# Altium PCB Board_VCA_Altium.pcbdoc
Units mm, origin at the board's own origin, x right, y up, seen from the top; angles counter-clockwise.
Board outline 57.86 x 53.54 mm, 2 copper layers (Top Layer, Bottom Layer); 18 components, 13 nets, 59 pads, 16 vias.
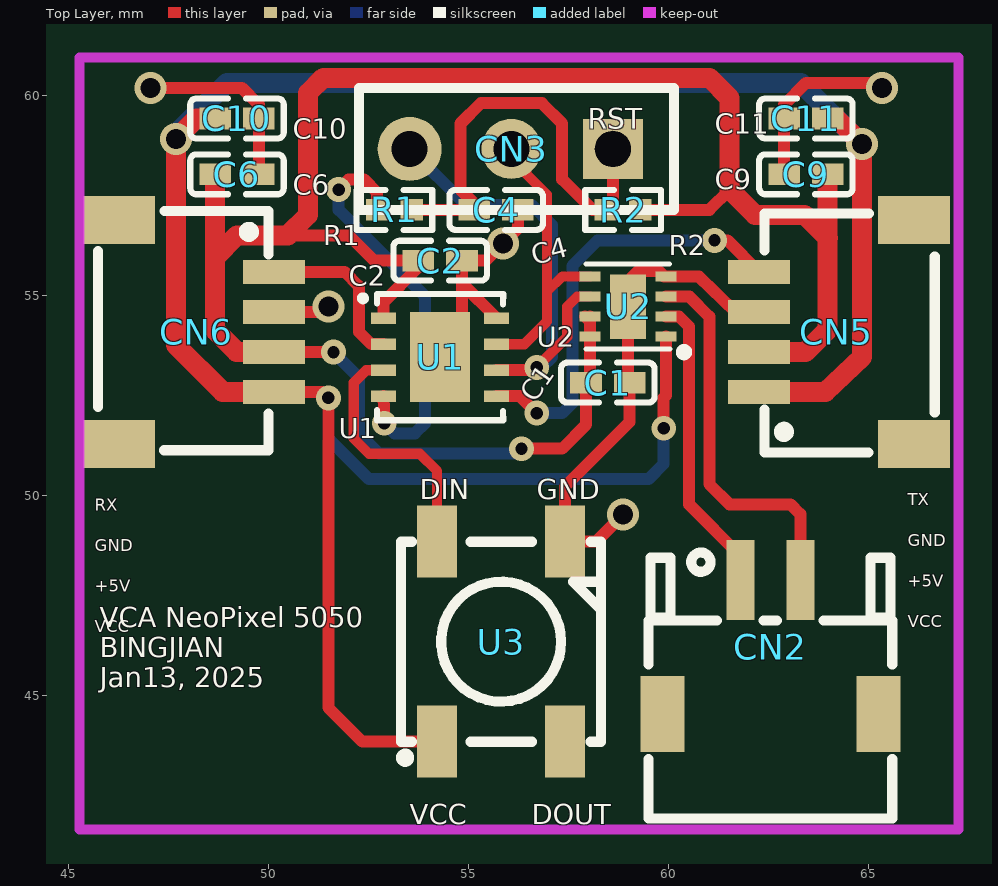
[diagram p0: Top Layer view]
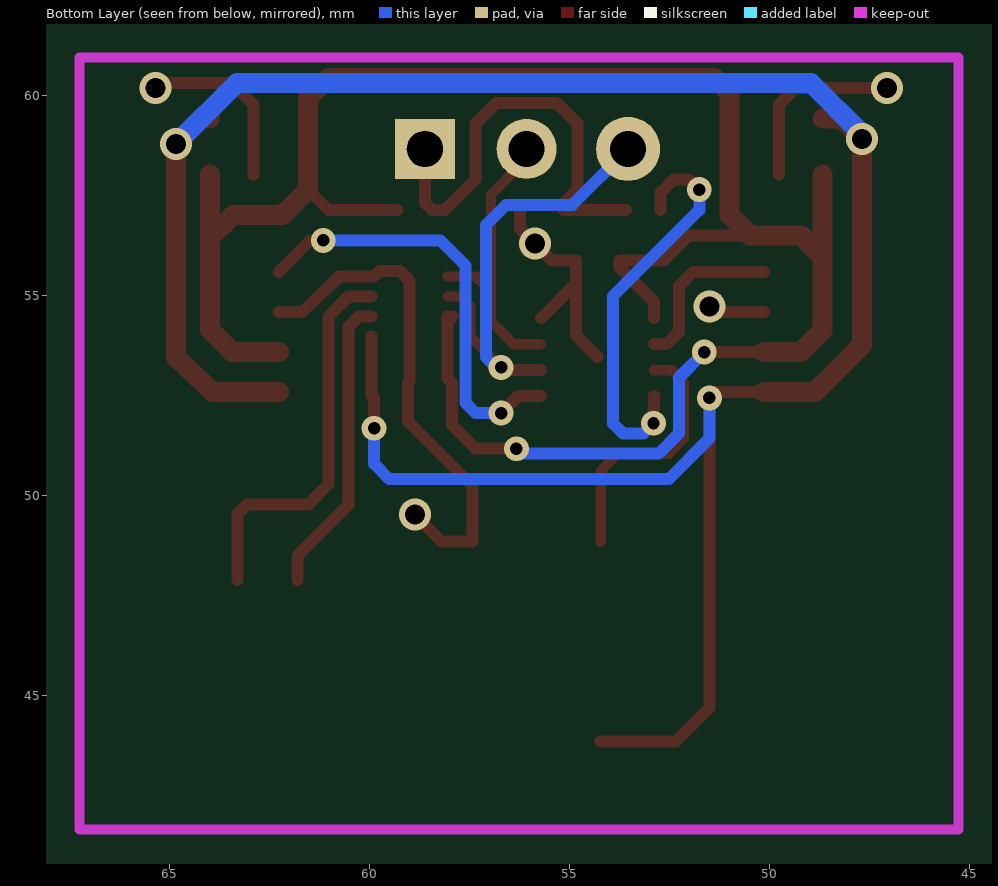
[diagram p1: Bottom Layer view, seen from below]

## Layer stack, top to bottom
Top Layer: signal copper (thickness not stored)
Dielectric: dielectric 0.32, FR-4, Dk 4.8
Bottom Layer: signal copper (thickness not stored)

## Board outline
83.258,25.4 25.4,25.4 25.4,78.942 83.258,78.942

## Components (designator, comment, footprint, x,y, rotation, side; value= is the part's Value field where it differs from the comment)
C1 "1uF" C0402 58.493,52.832 r180 top
C2 "100nF" C0402_NEW 54.302,55.88 r0 top
C4 "100nF" C0402_NEW 55.699,57.15 r180 top
C6 "C0402" C0402 49.222,58.039 r0 top
C9 "C0402" C0402 63.446,58.039 r0 top
C10 "C0402" C0402 49.222,59.436 r0 top
C11 "C0402" C0402 63.446,59.436 r0 top
CN2 "S2B-ZR-SM4A-TF(LF)(SN)" CONN-SMD_S2B-ZR-SM4A 62.557,46.228 r0 top
CN3 "3 Pads Solder" 3PADS-JED 56.08,58.674 r270 top
CN5 "SM04B-SRSS-TB (LF)(SN)" CONN-SMD_4P-P1.00_SM04B-SRSS-TB-LF-SN 64.208,54.102 r90 top
CN6 "SM04B-SRSS-TB (LF)(SN)" CONN-SMD_4P-P1.00_SM04B-SRSS-TB-LF-SN 48.206,54.102 r270 top
R1 "300Ω" R0402 53.159,57.15 r180 top
R2 "10kΩ" R0402 58.874,57.15 r0 top
U1 "PIC16F18313-E/RF" DFN-8_L3.0-W3.0-P0.65-BL-EP 54.302,53.467 r270 top
U2 "DRV8837DSGR" WSON-8_L2.0-W2.0-P0.50-TL-EP 59.001,54.737 r180 top
U3 "LED-SMD_4P-L5.0-W5.0-TL-2" LED-SMD_4P-L5.0-W5.0-TL-2 55.826,46.355 r90 top
? "" ? 56.271,63.639 r0 top
? "" ? 41.603,51.276 r0 top

## Footprints (in the part's own frame and the unit in brackets; to place one, negate y for a bottom-side part, rotate by r counter-clockwise, add the part's x,y. Pads: shape width x height; smd on the part's side, far side on the other; paste and mask are expansions set on the pad)
3PADS-JED [mm]
  rect 1.5x1.5 hole 0.9 slot 0.9 at 0 deg paste+0 mask+0.102: 1(0,2.54)
  round 1.5 hole 0.9 paste+0 mask+0.102: 2(0,0)
  round 1.6 hole 0.9 paste+0 mask+0.102: 3(0,-2.54)
  silkscreen extent -1.52,-3.81 1.52,4.06
C0402 [mm]
  rect 0.79x0.54 smd paste-100 mask+0.051: 1(-0.545,0) 2(0.545,0)
  silkscreen extent -1.17,-0.5 1.17,0.5
C0402_NEW [mm]
  rect 0.79x0.54 smd paste-100 mask+0.051: 1(-0.545,0) 2(0.545,0)
  silkscreen extent -1.17,-0.5 1.17,0.5
CONN-SMD_4P-P1.00_SM04B-SRSS-TB-LF-SN [mm]
  rect 0.6x1.55 smd paste+0 mask+0.051: 1(-1.5,1.938) 2(-0.5,1.938) 3(0.501,1.938) 4(1.5,1.938)
  rect 1.2x1.8 smd paste+0 mask+0.051: 5(2.8,-1.938) 6(-2.8,-1.938)
  silkscreen extent -3.02,-2.46 2.96,1.8
CONN-SMD_S2B-ZR-SM4A [mm]
  rect 1.1x1.9 smd paste+0 mask+0.051: 0(-2.7,-1.675) 0(2.7,-1.675)
  rect 0.7x2 smd paste+0 mask+0.051: 1(-0.75,1.675) 2(0.75,1.675)
  silkscreen extent -3.05,-4.29 3.05,2.36
DFN-8_L3.0-W3.0-P0.65-BL-EP [mm]
  rect 0.28x0.625 smd paste+0 mask+0.051: 1(-0.975,-1.412) 2(-0.325,-1.412) 3(0.325,-1.412) 4(0.975,-1.412) 5(0.975,1.412) 6(0.325,1.412) 7(-0.325,1.412) 8(-0.975,1.412)
  rect 2.25x1.5 smd paste+0 mask+0.051: 9(0,0)
  silkscreen extent -1.58,-2.01 1.58,1.58
LED-SMD_4P-L5.0-W5.0-TL-2 [mm]
  rect 1.8x1 smd paste+0 mask+0.051: 1(2.5,-1.6) 2(2.5,1.6) 3(-2.5,1.6) 4(-2.5,-1.6)
  silkscreen extent -3,-2.5 2.5,2.5
R0402 [mm]
  rect 0.566x0.54 smd paste-100 mask+0.051: 1(-0.433,0) 2(0.433,0)
  silkscreen extent -0.94,-0.5 0.94,0.5
WSON-8_L2.0-W2.0-P0.50-TL-EP [mm]
  rect 0.521x0.25 smd paste+0 mask+0.051: 1(-0.95,0.75) 2(-0.95,0.25) 3(-0.95,-0.25) 4(-0.95,-0.75) 5(0.95,-0.75) 6(0.95,-0.25) 7(0.95,0.25) 8(0.95,0.75)
  rect 0.902x1.613 smd paste+0 mask+0.051: 9(0,0.013)
  silkscreen extent -1.47,-1.06 1.06,1.22
? [mm]

## Via types
v1: diameter 0.62, hole 0.31, Top Layer to Bottom Layer, tented both sides, 9 vias
v2: diameter 0.8, hole 0.5, Top Layer to Bottom Layer, tented both sides, 7 vias

## Nets (pads, with @x,y where several pads share a name; then routed paths per layer and width w, separated by ;. In a path a pad name is that pad's centre, name@x,y a point inside that pad or via, vN(x,y) a via of type N, cw(c..) or ccw(c..) an arc to the next point about the centre after c; other vN are vias at no path point)
+5V: C1.2 C2.1 C6.1 C9.2 CN5.2 CN6.3 R2.2 U1.1 U2.7 U2.8 | length 54.6
  Top Layer w0.3: CN6.3 50.152,53.594 v1(51.635,53.594) ; 50.492,56.515 52.016,56.515 52.651,55.88 C2.1 53.757,55.716 52.89,54.849 U1.1 ; v1(56.334,51.181) 57.35,51.181 57.948,51.779 C1.2 58.051,52.935 U2.7 ; U2.7@57.924,54.487 58.051,54.36 U2.8 ; R2.2 61.033,57.15 61.541,57.658
  Top Layer w0.5: 48.676,55.844 48.676,55.969 49.222,56.515 50.492,56.515 51,57.023 51,60.071 51.381,60.452 61.033,60.452 61.541,59.944 61.541,57.658 62.176,57.023 63.416,57.023 63.992,56.446 ; C6.1 48.677,54.139 49.215,53.602 CN6.3 ; CN5.2 63.438,53.602 63.991,54.155 C9.2
  Bottom Layer w0.3: v1(51.635,53.594) 52.27,52.959 52.27,51.562 52.778,51.054 56.207,51.054 v1(56.334,51.181)
DIN: U1.3 U3.2 | length 6.5
  Top Layer w0.254: U1.3 52.453,53.142 52.143,52.832 52.143,51.435 52.524,51.054 53.794,51.054 54.226,50.622 U3.2
DOUT: U3.4
GND: C1.1 C2.2 C4.1 C6.2 C9.1 C10.2 C11.1 CN5.3 CN6.2 U1.8 U1.9 U2.4 U2.9 U3.1 | length 29.9
  Top Layer w0.3: v2(47.063,60.198) 49.349,60.198 49.767,59.78 C10.2 C6.2 ; CN6.2 51.373,54.602 v2(51.508,54.737) ; U1.9 54.847,54.012 C2.2 ; U1.8 54.847,55.309 C2.2 ; C4.1 56.244,56.679 55.871,56.305 55.445,55.88 C2.2 ; v2(58.874,49.53) 58.199,48.855 U3.1 57.426,50.241 59.038,51.853 C1.1 59.001,52.869 U2.9 59.001,55.372 59.255,55.626 59.763,55.626 59.902,55.487 U2.4 ; U2.4 60.767,55.486 61.676,54.602 CN5.3 ; C9.1 C11.1 62.901,59.78 63.446,60.325 65.224,60.325 v2(65.351,60.198)
  other v2: 55.871,56.305
OUT1: CN2.1 U2.2 | length 7.5
  Top Layer w0.3: U2.2 60.267,54.487 60.525,54.229 60.525,52.705 60.525,49.784 61.807,48.502 CN2.1@61.807,47.903
OUT2: CN2.2 U2.3 | length 9.7
  Top Layer w0.3: U2.3 60.53,54.986 61.033,54.483 61.033,52.959 61.033,50.292 61.541,49.784 63.065,49.784 63.307,49.543 CN2.2
RA0: CN3.2 U1.7 U2.5 | length 7.5
  Top Layer w0.254: U1.7 56.405,53.792 56.703,54.09 56.969,54.356 56.969,57.531 56.461,58.039 56.461,58.293 CN3.2 ; 56.969,55.049 56.969,55.118 57.363,55.486 U2.5
RA1: CN3.3 U1.6 U2.6 | length 11.7
  Top Layer w0.254: v1(56.715,53.213) 57.477,53.975 57.477,54.737 57.727,54.987 U2.6
  Top Layer w0.3: U1.6 56.644,53.142 v1(56.715,53.213)
  Bottom Layer w0.3: CN3.3 54.937,57.277 56.588,57.277 57.096,56.769 57.096,53.467 56.842,53.213 v1(56.715,53.213)
RST: R1.2 U1.4 | length 10.3
  Top Layer w0.3: v1(51.762,57.658) 52.016,57.912 52.397,57.912 52.726,57.583 R1.2 ; U1.4 v1(52.905,51.816)
  Bottom Layer w0.3: v1(51.762,57.658) 51.762,57.15 53.921,54.991 53.921,51.816 53.667,51.562 53.159,51.562 v1(52.905,51.816)
RX: CN6.1 U1.2 | length 4.2
  Top Layer w0.3: CN6.1 51.913,55.602 52.27,55.245 52.27,54.102 52.58,53.792 U1.2
SW: C4.2 CN3.1 R1.1 R2.1 | length 11.2
  Top Layer w0.3: R1.1 C4.2 ; C4.2 55.153,57.315 54.81,57.658 54.81,59.309 55.318,59.817 56.842,59.817 57.35,59.309 57.35,57.912 58.112,57.15 R2.1@58.443,57.15 ; R2.1 58.62,57.329 CN3.1
TX: CN5.4 U1.5 | length 10.9
  Top Layer w0.3: U1.5 56.293,52.492 v1(56.715,52.07) ; v1(61.16,56.388) 61.485,56.388 CN5.4
  Bottom Layer w0.3: v1(56.715,52.07) 57.35,52.07 57.604,52.324 57.604,55.753 58.239,56.388 60.652,56.388 v1(61.16,56.388)
VCC: C10.1 C11.2 CN5.1 CN6.4 U2.1 U3.3 | length 63.7
  Top Layer w0.3: 48.992,52.602 CN6.4 51.358,52.602 v1(51.508,52.451) 51.508,44.704 52.357,43.855 U3.3 ; v1(59.89,51.689) 59.89,52.451 59.951,52.512 U2.1
  Top Layer w0.5: C10.1 48.206,59.436 v2(47.698,58.928) 47.698,53.768 48.865,52.602 CN6.4 ; CN5.1 63.93,52.602 64.843,53.467 v2(64.843,58.801) 64.208,59.436 C11.2
  Bottom Layer w0.3: v1(51.508,52.451) 51.508,51.435 52.524,50.419 59.509,50.419 59.89,50.8 v1(59.89,51.689)
  Bottom Layer w0.5: v2(47.698,58.928) 47.698,59.055 48.968,60.325 63.319,60.325 v2(64.843,58.801)
pads on no net: CN2.0 CN5.5 CN5.6 CN6.5 CN6.6

## Polygon pours and split planes (outlines as drawn)
GND on Bottom Layer (solid): 42.618,62.992 69.669,62.992 69.669,39.37 69.288,38.989 42.999,38.989 42.491,39.497
VCC on Top Layer (solid): 43.507,62.103 70.558,62.103 70.558,38.481 70.177,38.1 43.888,38.1 43.38,38.608

## Silkscreen, mask and mechanical layers (free items; w line width, h text height)
Top Overlay:
  text "RST" at 57.985,59.182 h0.51
  text "C11" at 61.16,59.059 h0.5
  text "C10" at 50.619,58.932 h0.5
  text "C9" at 61.16,57.662 h0.5
  text "C6" at 50.619,57.535 h0.5
  text "R1" at 51.381,56.265 h0.5
  text "R2" at 60.017,56.011 h0.5
  text "C4" at 56.653,55.766 h0.5 r15
  text "C2" at 52.016,55.249 h0.5
  text "U2" at 56.715,53.725 h0.5
  text "C1" at 56.666,52.308 h0.5 r55
  text "U1" at 51.762,51.439 h0.5
  text "DIN" at 53.794,49.915 h0.5
  text "GND" at 56.715,49.915 h0.5
  text "TX" at 65.986,49.761 h0.3
  text "RX" at 45.666,49.634 h0.3
  text "GND" at 65.986,48.745 h0.3
  text "GND" at 45.666,48.618 h0.3
  text "+5V" at 65.986,47.729 h0.3
  text "+5V" at 45.666,47.602 h0.3
  text "VCC" at 65.986,46.713 h0.3
  text "VCC" at 45.666,46.586 h0.3
  text "VCA NeoPixel 5050 / BINGJIAN / Jan13, 2025" at 45.793,45.216 h0.5
  text "VCC" at 53.54,41.787 h0.5
  text "DOUT" at 56.588,41.787 h0.5